# EAGLE board IoT_2015 (EAGLE 7.3.0)
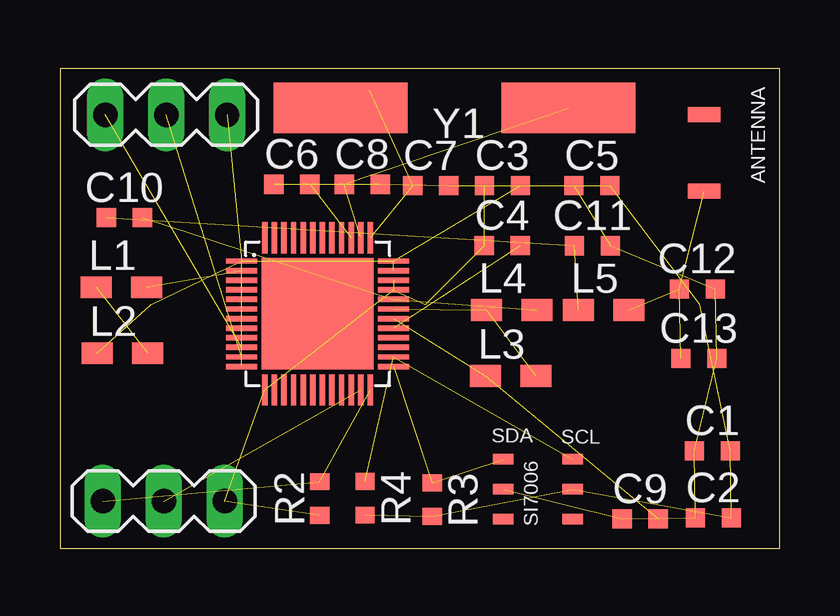
[diagram p0: board, top side]
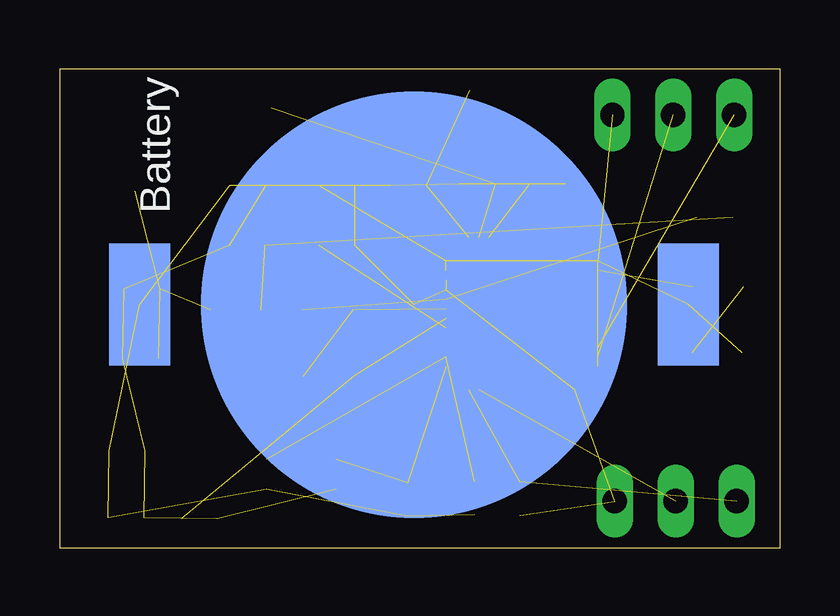
[diagram p1: board, bottom side, seen from below]

Size 30 x 20 mm. Coordinates in mm from the lower left corner, seen from the top.
Outline: 0,0 30,0 30,20 0,20 0,0
Copper layers (1*16): Top 0.035mm / dielectric 1.5mm / Bottom 0.035mm
Design rules "default": minimum track width 10mil, minimum drill 24mil, track to track 8mil, track to pad 8mil, pad to pad 8mil, via to via 8mil, smd to smd 8mil, copper to edge 40mil, drill to drill 8mil, minimum pad ring 10mil, minimum via ring 8mil, stop-mask expansion 4mil, vias tented up to drill 0mil, thermal gap 10mil

## Footprints (pad centres in the part's own frame; a part is rotated, then mirrored left to right if it is on the bottom)
W3008 = smd 0.62 x 1.36: E1 -1.6,0; E2 1.6,0
BAT-HLD-001 = smd 17.78 x 17.78: GND 0,0 | smd 2.54 x 5.08: VDD1 -11.43,0; VDD2 11.43,0
VJ1603_W1BC = smd 0.8 x 0.8: E1 -0.75,0; E2 0.75,0
MA03-1 = drill 1.016 long: 1 -2.54,0; 2 0,0; 3 2.54,0
JTI_CAT_2012_INDUCTORS_CHIP-242427 = smd 1.3 x 0.9: E1 -1.05,0; E2 1.05,0
ERJ-3GEYJ103V = smd 0.7 x 0.8: E1 -0.7,0; E2 0.7,0
SI7006-A20-IM = smd 0.85 x 0.45: DNC -1.45,-1.25; DNC2 1.45,-1.25; GND -1.45,0; SCL 1.45,1.25; SDA -1.45,1.25; VDD 1.45,0
QFN48 = smd 1.3 x 0.226: 1 -3.17,2.2; 2 -3.17,1.8; 3 -3.17,1.4; 4 -3.17,1; 5 -3.17,0.6; 6 -3.17,0.2; 7 -3.17,-0.2; 8 -3.17,-0.6; 9 -3.17,-1; 10 -3.17,-1.4; 11 -3.17,-1.8; 12 -3.17,-2.2; 25 3.17,-2.2; 26 3.17,-1.8; 27 3.17,-1.4; 28 3.17,-1; 29 3.17,-0.6; 30 3.17,-0.2; 31 3.17,0.2; 32 3.17,0.6; 33 3.17,1; 34 3.17,1.4; 35 3.17,1.8; 36 3.17,2.2 | smd 0.226 x 1.3: 13 -2.2,-3.17; 14 -1.8,-3.17; 15 -1.4,-3.17; 16 -1,-3.17; 17 -0.6,-3.17; 18 -0.2,-3.17; 19 0.2,-3.17; 20 0.6,-3.17; 21 1,-3.17; 22 1.4,-3.17; 23 1.8,-3.17; 24 2.2,-3.17; 37 2.2,3.17; 38 1.8,3.17; 39 1.4,3.17; 40 1,3.17; 41 0.6,3.17; 42 0.2,3.17; 43 -0.2,3.17; 44 -0.6,3.17; 45 -1,3.17; 46 -1.4,3.17; 47 -1.8,3.17; 48 -2.2,3.17 | smd 4.66 x 4.66: GND 0,0
ABLS-16.000MHZ-B4-T = smd 5.588 x 2.108: E1 -4.75,0; E2 4.75,0

## Placement (x,y rotation side)
ANTENNA  W3008  [W3008]  26.86,16.49 90 top
BATTERY  BAT-HLD-001  [BAT-HLD-001]  15.24,10.16 0 bottom
C1  [VJ1603_W1BC]  27.2,4.07 0 top
C2  [VJ1603_W1BC]  27.24,1.27 0 top
C3  [VJ1603_W1BC]  18.45,15.13 0 top
C4  [VJ1603_W1BC]  18.44,12.63 0 top
C5  [VJ1603_W1BC]  22.18,15.13 0 top
C6  [VJ1603_W1BC]  9.67,15.18 0 top
C7  [VJ1603_W1BC]  15.46,15.13 0 top
C8  [VJ1603_W1BC]  12.6,15.18 0 top
C9  [VJ1603_W1BC]  24.19,1.23 0 top
C10  [VJ1603_W1BC]  2.69,13.79 0 top
C11  [VJ1603_W1BC]  22.2,12.62 0 top
C12  [VJ1603_W1BC]  26.57,10.82 0 top
C13  [VJ1603_W1BC]  26.64,7.92 0 top
JTAG  [MA03-1]  4.33,1.97 0 top
L1  [JTI_CAT_2012_INDUCTORS_CHIP-242427]  2.56,10.89 0 top
L2  [JTI_CAT_2012_INDUCTORS_CHIP-242427]  2.6,8.14 0 top
L3  [JTI_CAT_2012_INDUCTORS_CHIP-242427]  18.79,7.19 0 top
L4  [JTI_CAT_2012_INDUCTORS_CHIP-242427]  18.83,9.94 0 top
L5  [JTI_CAT_2012_INDUCTORS_CHIP-242427]  22.67,9.94 0 top
P67VDD  [MA03-1]  4.43,18.08 0 top
R2  [ERJ-3GEYJ103V]  10.83,2.08 90 top
R3  [ERJ-3GEYJ103V]  15.52,2.03 270 top
R4  [ERJ-3GEYJ103V]  12.72,2.09 270 top
SI7006  SI7006-A20-IM  [SI7006-A20-IM]  19.93,2.47 0 top
U$1  NRF51422  [QFN48]  10.74,9.78 0 top
Y1  ABLS-16.000MHZ-B4-T  [ABLS-16.000MHZ-B4-T]  16.45,18.36 180 top

## Library data of the parts
ANTENNA = Pulse
BATTERY = BAT-HLD-001
C1-C13 = Vishay
JTAG P67VDD = con-lstb; OC_FARNELL: unknown; OC_NEWARK: unknown
L1-L5 = JohansonTechnology
R2-R4 = Panasonic
SI7006 = SiliconLabs
U$1 = NordicSemi
Y1 = Abracon

## Nets
GND: BATTERY.GND C1.E1 C2.E1 C3.E1 C4.E1 C5.E1 C6.E1 C7.E2 C8.E2 C9.E1 C11.E2 C12.E2 C13.E2 JTAG.3 R2.E1 SI7006.GND U$1.13 U$1.33 U$1.34
N$1: L1.E1 L2.E2
N$2: L1.E2 U$1.2
N$3: C4.E2 U$1.29
N$4: ANTENNA.E1 C12.E1 C13.E1 L5.E2
N$5: C9.E2 L3.E1 U$1.30
N$6: L3.E2 L4.E1 U$1.31
N$7: C10.E2 L4.E2 U$1.32
N$8: C6.E2 U$1.39
N$9: C8.E1 U$1.38 Y1.E1
N$10: C7.E1 U$1.37 Y1.E2
N$11: C10.E1 C11.E1 L5.E1
P0.00: U$1.4
P0.01: U$1.5
P0.02: U$1.6
P0.03: U$1.7
P0.04: U$1.8
P0.05: U$1.9
P0.06: P67VDD.1 U$1.10
P0.07: P67VDD.2 U$1.11
SCL: R4.E1 SI7006.SCL U$1.26
SDA: R3.E1 SI7006.SDA U$1.25
SWDCLK: JTAG.1 R2.E2 U$1.24
SWDIO/NRESET: JTAG.2 U$1.23
VDD: BATTERY.VDD1 BATTERY.VDD2 C1.E2 C2.E2 C3.E2 C5.E2 L2.E1 P67VDD.3 R3.E2 R4.E2 SI7006.VDD U$1.1 U$1.12 U$1.35 U$1.36

## Tracks (layer width: path | path; a pad name or v marks a point on that pad's centre or on a via)
GND  (18 unrouted)
N$1  (1 unrouted)
N$2  (1 unrouted)
N$3  (1 unrouted)
N$4  (3 unrouted)
N$5  (2 unrouted)
N$6  (2 unrouted)
N$7  (2 unrouted)
N$8  (1 unrouted)
N$9  (2 unrouted)
N$10  (2 unrouted)
  Top 0.254: 12.9,19.1 10.86,19.1 Y1.E2
N$11  (2 unrouted)
P0.06  (1 unrouted)
P0.07  (1 unrouted)
SCL  (2 unrouted)
SDA  (2 unrouted)
SWDCLK  (2 unrouted)
SWDIO/NRESET  (1 unrouted)
VDD  (14 unrouted)